# EAGLE board untitled (EAGLE 6.1)
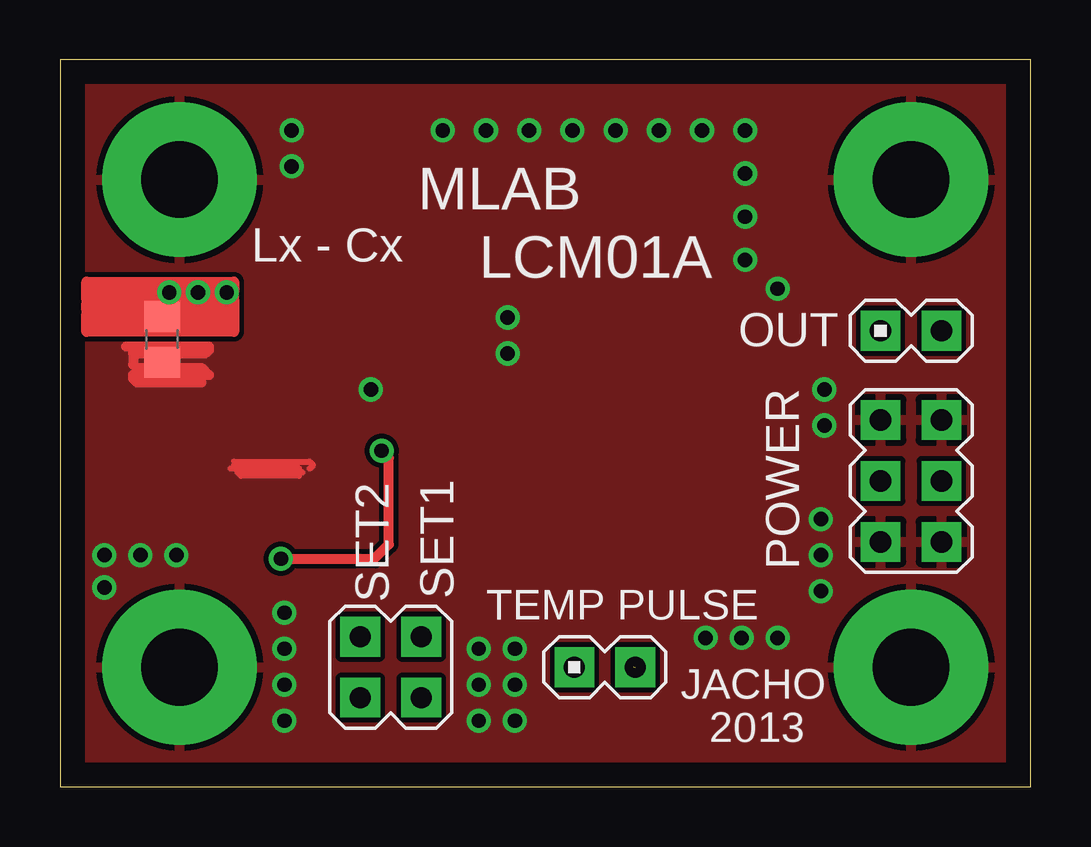
[diagram p0: board, top side]
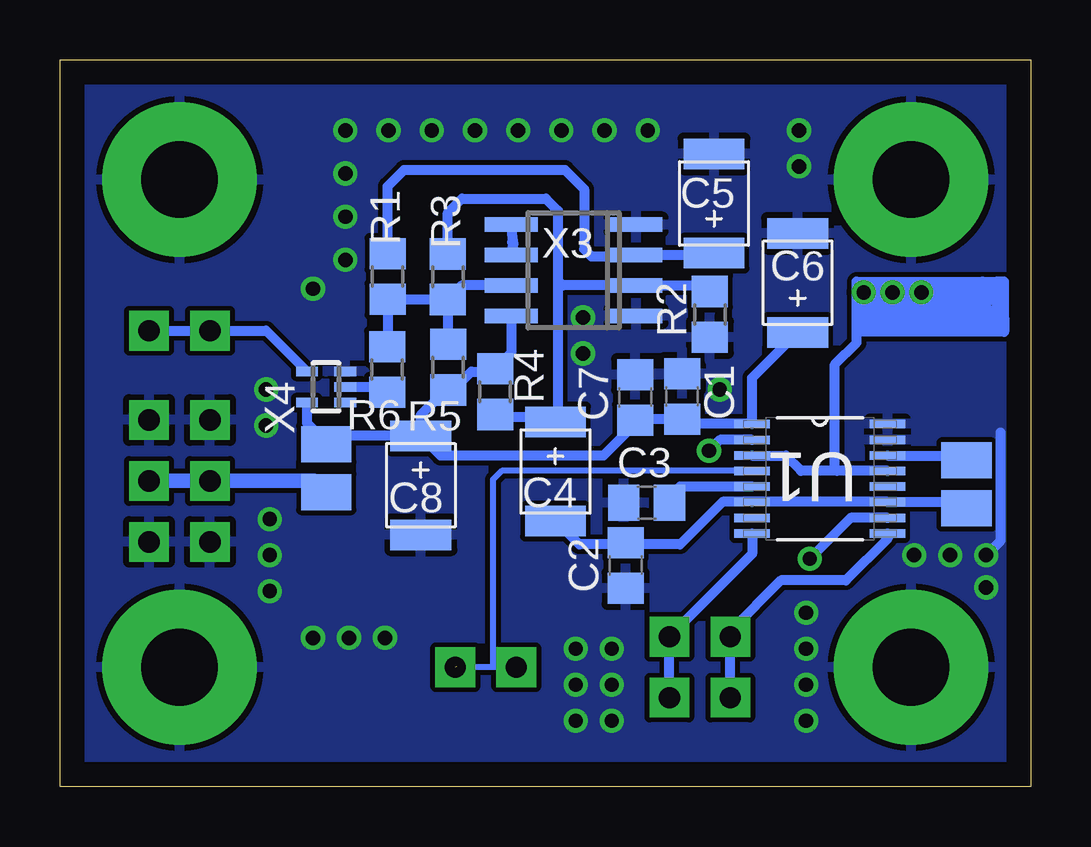
[diagram p1: board, bottom side, seen from below]

Size 40.44 x 30.28 mm. Coordinates in mm from the lower left corner, seen from the top.
Outline: 0,0 40.44,0 40.44,30.28 0,30.28 0,0
Copper layers (1*16): Top 0.035mm / dielectric 1.5mm / Bottom 0.035mm
Design rules: minimum track width 10mil, minimum drill 24mil, track to track 8mil, track to pad 8mil, pad to pad 8mil, via to via 8mil, smd to smd 8mil, copper to edge 40mil, drill to drill 8mil, minimum pad ring 10mil, minimum via ring 8mil, stop-mask expansion 4mil, vias tented up to drill 0mil, thermal gap 10mil

## Footprints (pad centres in the part's own frame; a part is rotated, then mirrored left to right if it is on the bottom)
C0805 = smd 1.3 x 1.5: 1 -0.95,0; 2 0.95,0
B = smd 1.27 x 2.54: + 2.223,0; - -1.905,0
1210 = smd 1.5 x 2.1: P$1 -1,0; P$2 1,0
0805 = smd 1.3 x 1.5: 1 -0.95,0; 2 0.95,0
MA02-2 = drill 0.889 pad 1.651 square: 1 -1.27,-1.27; 2 -1.27,1.27; 3 1.27,-1.27; 4 1.27,1.27
MA03-2 = drill 0.889 pad 1.651 square: 1 -2.54,-1.27; 2 -2.54,1.27; 3 0,-1.27; 4 0,1.27; 5 2.54,-1.27; 6 2.54,1.27
MA02-1 = drill 0.889 pad 1.651 square: 1 -1.27,0; 2 1.27,0
SOP65P640X120-16N = smd 1.473 x 0.356: 1 -2.819,2.286; 2 -2.819,1.626; 3 -2.819,0.965; 4 -2.819,0.33; 5 -2.819,-0.33; 6 -2.819,-0.965; 7 -2.819,-1.626; 8 -2.819,-2.286; 9 2.819,-2.286; 10 2.819,-1.626; 11 2.819,-0.965; 12 2.819,-0.33; 13 2.819,0.33; 14 2.819,0.965; 15 2.819,1.626; 16 2.819,2.286
SROUB3M = drill 3.2 pad 6.452: P$1 0,0
SO8 = smd 0.6 x 2.2: 1 -1.905,-2.6; 2 -0.635,-2.6; 3 0.635,-2.6; 4 1.905,-2.6; 5 1.905,2.6; 6 0.635,2.6; 7 -0.635,2.6; 8 -1.905,2.6
SOT353 = smd 0.4 x 0.9: 1 -0.65,-0.8; 2 0,-0.8; 3 0.65,-0.8; 4 0.65,0.8; 5 -0.65,0.8

## Placement (x,y rotation side)
C1  [C0805]  14.52,16.26 90 bottom
C2  [C0805]  16.87,9.22 90 bottom
C3  [C0805]  15.99,11.83 0 bottom
C4  [B]  19.79,12.97 90 bottom
C5  [B]  13.19,24.46 270 bottom
C6  [B]  9.71,21.15 270 bottom
C7  [C0805]  16.47,16.22 90 bottom
C8  [B]  25.4,12.4 90 bottom
CX-LX  [C0805]  4.25,18.64 90 top
L1  [1210]  2.67,12.6 90 bottom
L2  [1210]  29.34,13.27 270 bottom
R1  [0805]  26.79,21.26 90 bottom
R2  [0805]  13.36,19.68 90 bottom
R3  [0805]  24.28,21.25 90 bottom
R4  [0805]  22.31,16.46 90 bottom
R5  [0805]  24.27,17.48 270 bottom
R6  [0805]  26.81,17.38 90 bottom
SV1  [MA02-2]  13.78,4.98 180 top
SV2  [MA03-2]  35.46,12.74 90 top
SV3  MA02-1  [MA02-1]  22.7,4.98 180 top
SV4  MA02-1  [MA02-1]  35.46,19 180 top
U1  ADG888YRUZ  [SOP65P640X120-16N]  8.78,12.83 0 bottom
X1  SROUB3M  [SROUB3M]  4.98,4.98 0 top
X2  SROUB3M  [SROUB3M]  4.98,25.3 0 top
X3  [SO8]  19.04,21.52 90 bottom
X4  [SOT353]  29.35,16.65 90 bottom
X6  SROUB3M  [SROUB3M]  35.46,25.3 0 top
X7  SROUB3M  [SROUB3M]  35.46,4.98 0 top

## Library data of the parts
C1-C8 CX-LX = moje_C
L1 L2 = moje_L
R1-R6 = moje_R
SV1 SV3 SV4 = moje_hrebinky
SV2 = moje_hrebinky; OC_FARNELL: unknown; OC_NEWARK: unknown
U1 = moje_tlacitka; MPN: ADG888YRUZ; OC_FARNELL: 1117866; OC_NEWARK: 19M0698; PACKAGE: TSSOP-16; SUPPLIER: Analog Devices
X1 X2 X6 X7 = moje
X3 X4 = moje_komp

## Nets
C+: CX-LX.2 U1.3 U1.13
GND: C1.2 C2.1 C3.1 C5.- C6.- C7.2 C8.- CX-LX.1 R2.1 SV2.1 SV2.2 SV2.5 SV2.6 U1.15 U1.16 X1.P$1 X2.P$1 X3.1 X3.4 X4.3 X6.P$1 X7.P$1
N$3: C2.2 C4.- L1.P$1 U1.6 U1.11
N$4: X3.5 X3.6
N$5: U1.7
N$6: C3.2 U1.5
N$7: U1.2 U1.10
N$8: SV1.1 SV1.2 U1.8
N$9: SV3.1 SV3.2 U1.4
N$10: L1.P$2 U1.14
N$11: U1.12
N$12: C5.+ R1.2 X3.3
N$13: R1.1 R3.1 R5.1 R6.2 X3.7
N$14: SV1.3 SV1.4 U1.9
N$15: R6.1 X4.2
N$16: C4.+ R2.2 R3.2 R4.1 X3.2
N$17: SV4.1 SV4.2 X4.4
NAP: C1.1 C6.+ C7.1 C8.+ L2.P$1 R4.2 R5.2 U1.1 X3.8 X4.5
VCC: L2.P$2 SV2.3 SV2.4

## Tracks (layer width: path | path; a pad name or v marks a point on that pad's centre or on a via)
C+  (via drill 0.6)
  Top 0.406: 6.95,19.85 1.1,19.85 | 1.1,19.85 1.1,20.15 | 1.1,20.3 1.1,20.6 | 1.1,20.6 1.1,21.05 7.25,21.05 7.25,20.75 | 7.25,20.75 7.25,20.6 | 7.25,20.3 7.25,20 | 7.25,20 6.95,20.3 1.1,20.3 | 1.1,20.3 1.1,20.15 | 1.1,20.15 7.1,20.15 7.25,20.3 | 7.25,20.3 7.25,20.6 | 7.25,20.6 v6.95,20.6 v5.75,20.6 v4.55,20.6 | v4.55,20.6 1.1,20.6 | 1.25,20.75 7.25,20.75 | 7.25,20 7.25,19.1 | 7.25,19.1 7.25,18.95 1.1,18.95 1.1,19.1 | 1.1,19.1 1.1,19.7 | 1.1,19.85 1.1,19.7 | 1.1,19.7 1.25,19.55 7.1,19.55 7.1,19.25 | 7.1,19.25 7.25,19.1 | 7.25,19.1 1.1,19.1 | 1.25,19.4 6.95,19.4 7.1,19.25 | CX-LX.2 4.25,20.3 v4.55,20.6
  Bottom 0.406: 8.06,13.16 9.56,13.16 10.2,13.79 U1.3 | U1.13 8.06,13.16 | 8.06,13.16 8.15,13.25 8.15,17.6 7.25,18.5 7.25,18.95 | 7.25,19.4 7.25,19.55 | 7.25,19.55 7.25,20.75 | 7.25,20.75 7.25,21.05 2,21.05 | 2,21.05 2,20.75 | 7.25,20.75 2,20.75 | 2,20.75 2,19.85 | 2,19.85 6.95,19.85 7.1,20 7.1,20.6 v6.95,20.6 v5.75,20.6 v4.55,20.6 2.15,20.6 2.15,20.45 2.3,20.3 6.8,20.3 6.95,20.45 6.95,20.15 6.8,20 2.15,20 | 2,19.85 1.1,19.85 | 1.1,19.85 1.1,21.05 1.4,21.05 | 2,21.05 1.4,21.05 | 1.4,21.05 1.25,20.9 1.7,20.9 1.85,20.75 1.85,20.45 1.7,20.3 | 1.7,20.3 1.55,20.3 1.4,20.15 1.4,20.3 | 1.4,20.3 1.7,20.6 1.7,20.3 | 1.7,20.3 1.85,20.15 | 1.4,20.3 1.4,20.75 | 7.25,19.55 1.1,19.55 | 1.1,19.55 1.1,19.85 | 1.1,19.55 1.1,19.4 | 1.1,19.25 1.1,18.95 7.25,18.95 | 7.25,18.95 7.25,19.25 | 7.25,19.25 7.25,19.4 | 7.25,19.4 1.1,19.4 | 1.1,19.4 1.1,19.25 | 1.1,19.25 7.25,19.25
GND  (via drill 0.6)
  Top 0.254: 7.25,13.55 10.4,13.55 10.55,13.4 10.4,13.25 | 7.25,13.4 9.8,13.4 9.95,13.25 9.95,12.95 7.55,12.95 7.4,13.1 9.95,13.1 | 10.1,13.1 9.95,13.1 | 9.95,13.1 9.8,13.25 7.1,13.25
  Top 0.406: 2.75,18.35 6.2,18.35 6.2,18.2 6.05,18.05 3.05,18.05 3.05,17.6 3.2,17.45 5.9,17.45 6.2,17.15 3.05,17.15 3.05,17 3.2,16.85 5.9,16.85
  Bottom 0.406: 1.25,14.75 1.25,10.25 v1.85,9.65
  other vias: 29.9,6.2 28.4,6.2 26.9,6.2 31.7,11.15 31.7,9.65 31.7,8.15 3.35,9.65 31.85,16.55 31.85,15.05 15.95,27.35 17.75,27.35 19.55,27.35 21.35,27.35 23.15,27.35 24.95,27.35 26.75,27.35 9.65,27.35 9.65,25.85 9.35,7.25 9.35,5.75 9.35,4.25 28.55,27.35 28.55,25.55 28.55,23.75 28.55,21.95 29.9,20.75 18.65,19.55 18.65,18.05 12.95,16.55 17.45,4.25 17.45,5.75 18.95,5.75 18.95,4.25 9.35,2.75 17.45,2.75 18.95,2.75 1.85,8.3 4.85,9.65
  pour Bottom: -0.2,-0.1 40.6,-0.1 40.6,30.2 -0.2,30.2
  pour Top: 0.2,30.2 -0.1,30.2 -0.1,-0.1 40.4,-0.1 40.4,30.2 0.5,30.2
N$3
  Bottom 0.406: L1.P$1 3.73,11.87 U1.11 U1.6 12.84,11.87 14.6,10.1 16.94,10.1 | 16.94,10.1 C2.2 | 16.94,10.1 18.8,10.1 19.7,11 20,11 19.93,11.07 C4.-
N$4
  Bottom 0.406: X3.6 21.54,22.64 21.6,22.7 21.56,22.7 X3.5
N$6
  Bottom 0.406: U1.5 14.6,12.5 15.05,12.05 | 15.05,12.05 15.2,11.9 | C3.2 15.04,12.04 15.05,12.05
N$7  (via drill 0.6)
  Top 0.406: v9.2,9.5 13.1,9.5 13.7,10.1 13.7,13.7 v13.4,14
  Bottom 0.406: U1.10 7.5,11.2 v9.2,9.5 | 13.1,14.3 v13.4,14 12.94,14.46 U1.2
N$8
  Bottom 0.406: U1.8 11.6,9.7 SV1.1 SV1.2
N$9  (1 unrouted)
  Bottom 0.254: SV3.2 22.4,4.98 | 22.4,4.98 23.88,4.98 23.9,5 | 22.4,4.98 22.4,12.8 22.04,13.16 U1.4
N$10
  Bottom 0.406: U1.14 3.67,13.79 L1.P$2
N$12
  Bottom 0.406: 13.6,22.4 13.44,22.24 C5.+ 13.27,22.15 X3.3 16.4,22.2 16.5,22.1 18.3,22.1 18.6,22.4 18.6,24.9 19.4,25.7 26.1,25.7 26.79,25.01 R1.2
N$13
  Bottom 0.406: X3.7 23.7,20.88 R3.1 | R3.1 R1.1 26.79,18.35 R6.2 | R3.1 R5.1
N$14
  Bottom 0.406: SV1.4 SV1.3 12.5,6.5 10.4,8.6 7.7,8.6 5.96,10.34 U1.9
N$15
  Bottom 0.406: X4.2 27.04,16.65 R6.1
N$16
  Bottom 0.406: R2.2 13.62,20.88 X3.2 19.48,20.88 19.7,21.1 | R3.2 24.28,23.92 23.7,24.5 20.2,24.5 19.7,24 19.7,21.1 | 19.7,21.1 19.7,15.5 | 19.7,15.5 19.8,15.4 | 19.8,15.4 19.7,15.4 | 19.8,15.4 22.2,15.4 R4.1 | C4.+ 19.7,15.5
N$17
  Bottom 0.406: SV4.1 SV4.2 31.85,19 X4.4
NAP
  Bottom 0.406: C6.+ 11.6,17.04 U1.1 14.3,15.12 | C8.+ 24.58,13.8 17.8,13.8 16.93,14.67 C7.1 16.43,15.31 C1.1 14.49,15.31 14.3,15.12 | C8.+ 28.99,14.62 29,14.62 | 29,14.62 L2.P$1 | C8.+ 25.4,15.5 24.5,16.4 24.2,16.4 | 24.2,16.4 23.3,17.3 22.4,17.3 22.31,17.39 R4.2 21.64,18.08 X3.8 | 24.2,16.4 24.2,16.46 R5.2 | X4.5 30.15,15.16 29.3,14.3 29,14.3 29,14.62 | 14.3,15.12 14.52,15.12 14.6,15.2
VCC
  Bottom 0.61: SV2.3 SV2.4 29.84,12.74 29.6,12.5 29.37,12.27 | 29.37,12.27 29.3,12.2 29.3,12.5 | L2.P$2 29.37,12.27

## Text on the board
tPlace: MLAB | Lx - Cx | LCM01A | OUT | POWER | SET2 | SET1 | TEMP PULSE | JACHO | 2013